# EAGLE board KeyboardBreakoutRev2 (EAGLE 9.1.3)
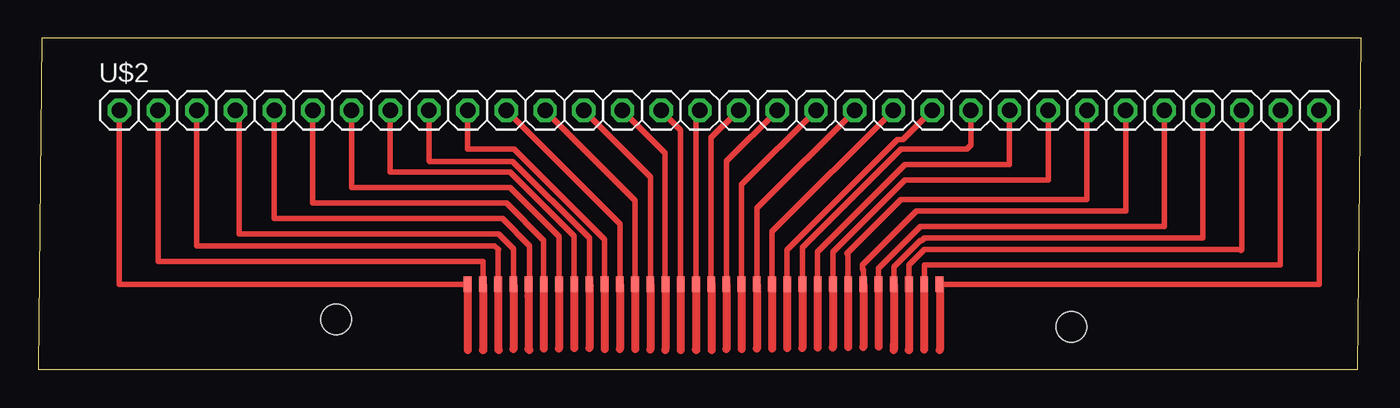
[diagram p0: board, top side]

Size 86.85 x 21.77 mm. Coordinates in mm from the lower left corner, seen from the top.
Outline: 0,0 86.59,0 86.85,21.77 0.25,21.77 0,0
Copper layers (1*16): Top 0.035mm / dielectric 1.5mm / Bottom 0.035mm
Design rules "default *": minimum track width 6mil, minimum drill 0.35mm, track to track 10mil, track to pad 10mil, pad to pad 6mil, via to via 6mil, smd to smd 6mil, copper to edge 40mil, drill to drill 6mil, minimum pad ring 10mil, minimum via ring 8mil, stop-mask expansion 4mil, vias tented up to drill 0mil, thermal gap 10mil
Holes 2 mm at 19.56,3.3 67.82,2.79

## Footprints (pad centres in the part's own frame; a part is rotated, then mirrored left to right if it is on the bottom)
32PIN = smd 1.016 x 0.508: P$1 0,0; P$2 0,0.999; P$3 0,1.997; P$4 0,2.996; P$5 0,3.994; P$6 0,4.993; P$7 0,5.991; P$8 0,6.99; P$9 0,7.989; P$10 0,8.987; P$11 0,9.986; P$12 0,10.984; P$13 0,11.983; P$14 0,12.981; P$15 0,13.98; P$16 0,14.979; P$17 0,15.977; P$18 0,16.976; P$19 0,17.974; P$20 0,18.973; P$21 0,19.972; P$22 0,20.97; P$23 0,21.969; P$24 0,22.967; P$25 0,23.966; P$26 0,24.964; P$27 0,25.963; P$28 0,26.962; P$29 0,27.96; P$30 0,28.959; P$31 0,29.957; P$32 0,30.956
32PINTHRU = drill 1.016 octagon: 1 1.27,0; 2 3.81,0; 3 6.35,0; 4 8.89,0; 5 11.43,0; 6 13.97,0; 7 16.51,0; 8 19.05,0; 9 21.59,0; 10 24.13,0; 11 26.67,0; 12 29.21,0; 13 31.75,0; 14 34.29,0; 15 36.83,0; 16 39.37,0; 17 41.91,0; 18 44.45,0; 19 46.99,0; 20 49.53,0; 21 52.07,0; 22 54.61,0; 23 57.15,0; 24 59.69,0; 25 62.23,0; 26 64.77,0; 27 67.31,0; 28 69.85,0; 29 72.39,0; 30 74.93,0; 31 77.47,0; 32 80.01,0

## Placement (x,y rotation side)
U$1  32  [32PIN]  28.19,5.59 270 top
U$2  32THRU  [32PINTHRU]  4.06,17.02 0 top

## Library data of the parts
U$1 U$2 = Controller Library

## Nets
N$1: U$1.P$32 U$2.32
N$2: U$1.P$31 U$2.31
N$3: U$1.P$30 U$2.30
N$4: U$1.P$29 U$2.29
N$5: U$1.P$28 U$2.28
N$6: U$1.P$27 U$2.27
N$7: U$1.P$26 U$2.26
N$8: U$1.P$25 U$2.25
N$9: U$1.P$24 U$2.24
N$10: U$1.P$23 U$2.23
N$11: U$1.P$22 U$2.22
N$12: U$1.P$21 U$2.21
N$13: U$1.P$20 U$2.20
N$14: U$1.P$19 U$2.19
N$15: U$1.P$18 U$2.18
N$16: U$1.P$17 U$2.17
N$17: U$1.P$16 U$2.16
N$18: U$1.P$15 U$2.15
N$19: U$1.P$14 U$2.14
N$20: U$1.P$13 U$2.13
N$21: U$1.P$12 U$2.12
N$22: U$1.P$11 U$2.11
N$23: U$1.P$10 U$2.10
N$24: U$1.P$9 U$2.9
N$25: U$1.P$8 U$2.8
N$26: U$1.P$7 U$2.7
N$27: U$1.P$6 U$2.6
N$28: U$1.P$5 U$2.5
N$29: U$1.P$4 U$2.4
N$30: U$1.P$3 U$2.3
N$31: U$1.P$2 U$2.2
N$32: U$1.P$1 U$2.1

## Tracks (layer width: path | path; a pad name or v marks a point on that pad's centre or on a via)
N$1
  Top 0.356: U$1.P$32 84.07,5.59 U$2.32
  Top 0.533: U$1.P$32 59.18,5.56 59.18,1.28
N$2
  Top 0.356: U$1.P$31 58.17,5.6 58.17,6.86 79.76,6.86 81.53,6.86 U$2.31
  Top 0.533: U$1.P$31 58.15,1.3
N$3
  Top 0.356: U$2.30 78.99,7.87 78.94,7.82 78.89,7.87 58.17,7.87 57.15,6.86 U$1.P$30
  Top 0.533: U$1.P$30 57.15,1.63 | 57.15,1.63 57.17,1.61 | 57.15,1.63 57.15,1.29 57.15,1.28
N$4
  Top 0.356: U$2.29 76.45,8.64 58.17,8.64 58.01,8.48 57.91,8.48 56.15,6.72 U$1.P$29
  Top 0.533: U$1.P$29 56.15,1.61 | 56.15,1.61 56.16,1.61 56.16,1.51 | 56.15,1.61 56.15,1.28
N$5
  Top 0.356: U$2.28 73.91,9.4 57.91,9.4 55.16,6.64 U$1.P$28
  Top 0.533: U$1.P$28 55.16,1.5
N$6
  Top 0.356: U$2.27 71.37,10.41 57.66,10.41 54.1,6.86 54.1,6.6 54.16,6.55 U$1.P$27
  Top 0.533: U$1.P$27 54.16,1.47
N$7
  Top 0.356: U$2.26 68.83,11.18 56.64,11.18 53.09,7.62 53.16,7.55 U$1.P$26
  Top 0.533: U$1.P$26 53.16,1.46
N$8
  Top 0.356: U$2.25 66.29,12.45 56.9,12.45 52.16,7.71 U$1.P$25
  Top 0.533: U$1.P$25 52.16,1.45
N$9
  Top 0.254: U$1.P$24 51.31,5.73
  Top 0.356: U$2.24 63.75,13.46 56.9,13.46 51.16,7.73 U$1.P$24
  Top 0.533: U$1.P$24 51.16,1.43
N$10
  Top 0.356: U$2.23 61.21,14.73 60.96,14.48 56.64,14.48 50.16,8 U$1.P$23
  Top 0.533: U$1.P$23 50.16,1.41
N$11
  Top 0.356: U$2.22 56.74,15.09 56.39,15.09 49.16,7.86 U$1.P$22
  Top 0.533: U$1.P$22 49.16,1.4
N$12
  Top 0.254: U$1.P$21 48.26,5.68
  Top 0.356: U$1.P$21 48.17,9.05 U$2.21
  Top 0.533: U$1.P$21 48.17,1.38
N$13
  Top 0.356: U$1.P$20 47.17,10.59 U$2.20
  Top 0.533: U$1.P$20 47.17,1.36
N$14
  Top 0.356: U$1.P$19 46.17,12.13 U$2.19
  Top 0.533: U$1.P$19 46.17,1.33
N$15
  Top 0.356: U$1.P$18 45.17,13.67 U$2.18
  Top 0.533: U$1.P$18 45.17,1.33
N$16
  Top 0.254: 44.2,5.61 U$1.P$17
  Top 0.356: U$1.P$17 44.17,15.21 U$2.17
  Top 0.533: U$1.P$17 44.2,5.56 44.2,1.28
N$17
  Top 0.356: U$1.P$16 43.17,16.76 U$2.16
  Top 0.533: U$1.P$16 43.17,1.29 43.18,1.28
N$18
  Top 0.356: U$1.P$15 42.17,15.74 U$2.15
  Top 0.533: U$1.P$15 42.16,1.28
N$19
  Top 0.356: U$1.P$14 41.15,5.62 41.15,14.22 U$2.14
  Top 0.533: U$1.P$14 41.17,1.31 41.15,1.28
N$20
  Top 0.254: U$1.P$13 40.13,5.63
  Top 0.356: U$1.P$13 40.18,12.66 U$2.13
  Top 0.533: U$1.P$13 40.18,1.31
N$21
  Top 0.356: U$2.12 39.18,11.11 U$1.P$12
  Top 0.533: U$1.P$12 39.18,1.35
N$22
  Top 0.356: U$2.11 38.18,9.57 U$1.P$11
  Top 0.533: U$1.P$11 38.18,1.35
N$23
  Top 0.356: U$1.P$10 37.18,8.54 31.24,14.48 28.19,14.48 U$2.10
  Top 0.533: U$1.P$10 37.18,1.35
N$24
  Top 0.356: U$1.P$9 36.18,8.62 31.14,13.66 25.7,13.66 25.65,13.72 U$2.9
  Top 0.533: U$1.P$9 36.18,1.41
N$25
  Top 0.356: U$1.P$8 35.18,8.76 30.99,12.95 23.11,12.95 U$2.8
  Top 0.533: U$1.P$8 35.18,1.39
N$26
  Top 0.356: U$1.P$7 34.19,8.74 30.99,11.94 20.57,11.94 U$2.7
  Top 0.533: U$1.P$7 34.19,1.39
N$27
  Top 0.356: U$1.P$6 33.19,8.47 30.73,10.92 18.03,10.92 U$2.6
  Top 0.533: U$1.P$6 33.19,1.37
N$28
  Top 0.356: 32.19,4.83 32.26,4.9 32.26,8.13 30.48,9.91 15.49,9.91 U$2.5
  Top 0.533: U$1.P$5 32.19,4.83 32.19,1.34 32.24,1.28
N$29
  Top 0.356: U$2.4 13.21,16.76 13.21,8.89 30.23,8.89 31.19,7.93 U$1.P$4
  Top 0.533: U$1.P$4 31.19,1.33
N$30
  Top 0.356: U$1.P$3 30.19,7.84 30.23,7.87 29.97,8.13 10.41,8.13 U$2.3
  Top 0.533: U$1.P$3 30.19,1.32 30.23,1.28
N$31
  Top 0.356: U$1.P$2 29.21,5.61 29.21,7.11 7.87,7.11 U$2.2
  Top 0.533: U$1.P$2 29.19,1.29 29.2,1.28 29.21,1.28
N$32
  Top 0.356: U$1.P$1 5.33,5.59 U$2.1
  Top 0.533: U$1.P$1 28.19,1.28